# Allegro board AUTO_SAVE.brd
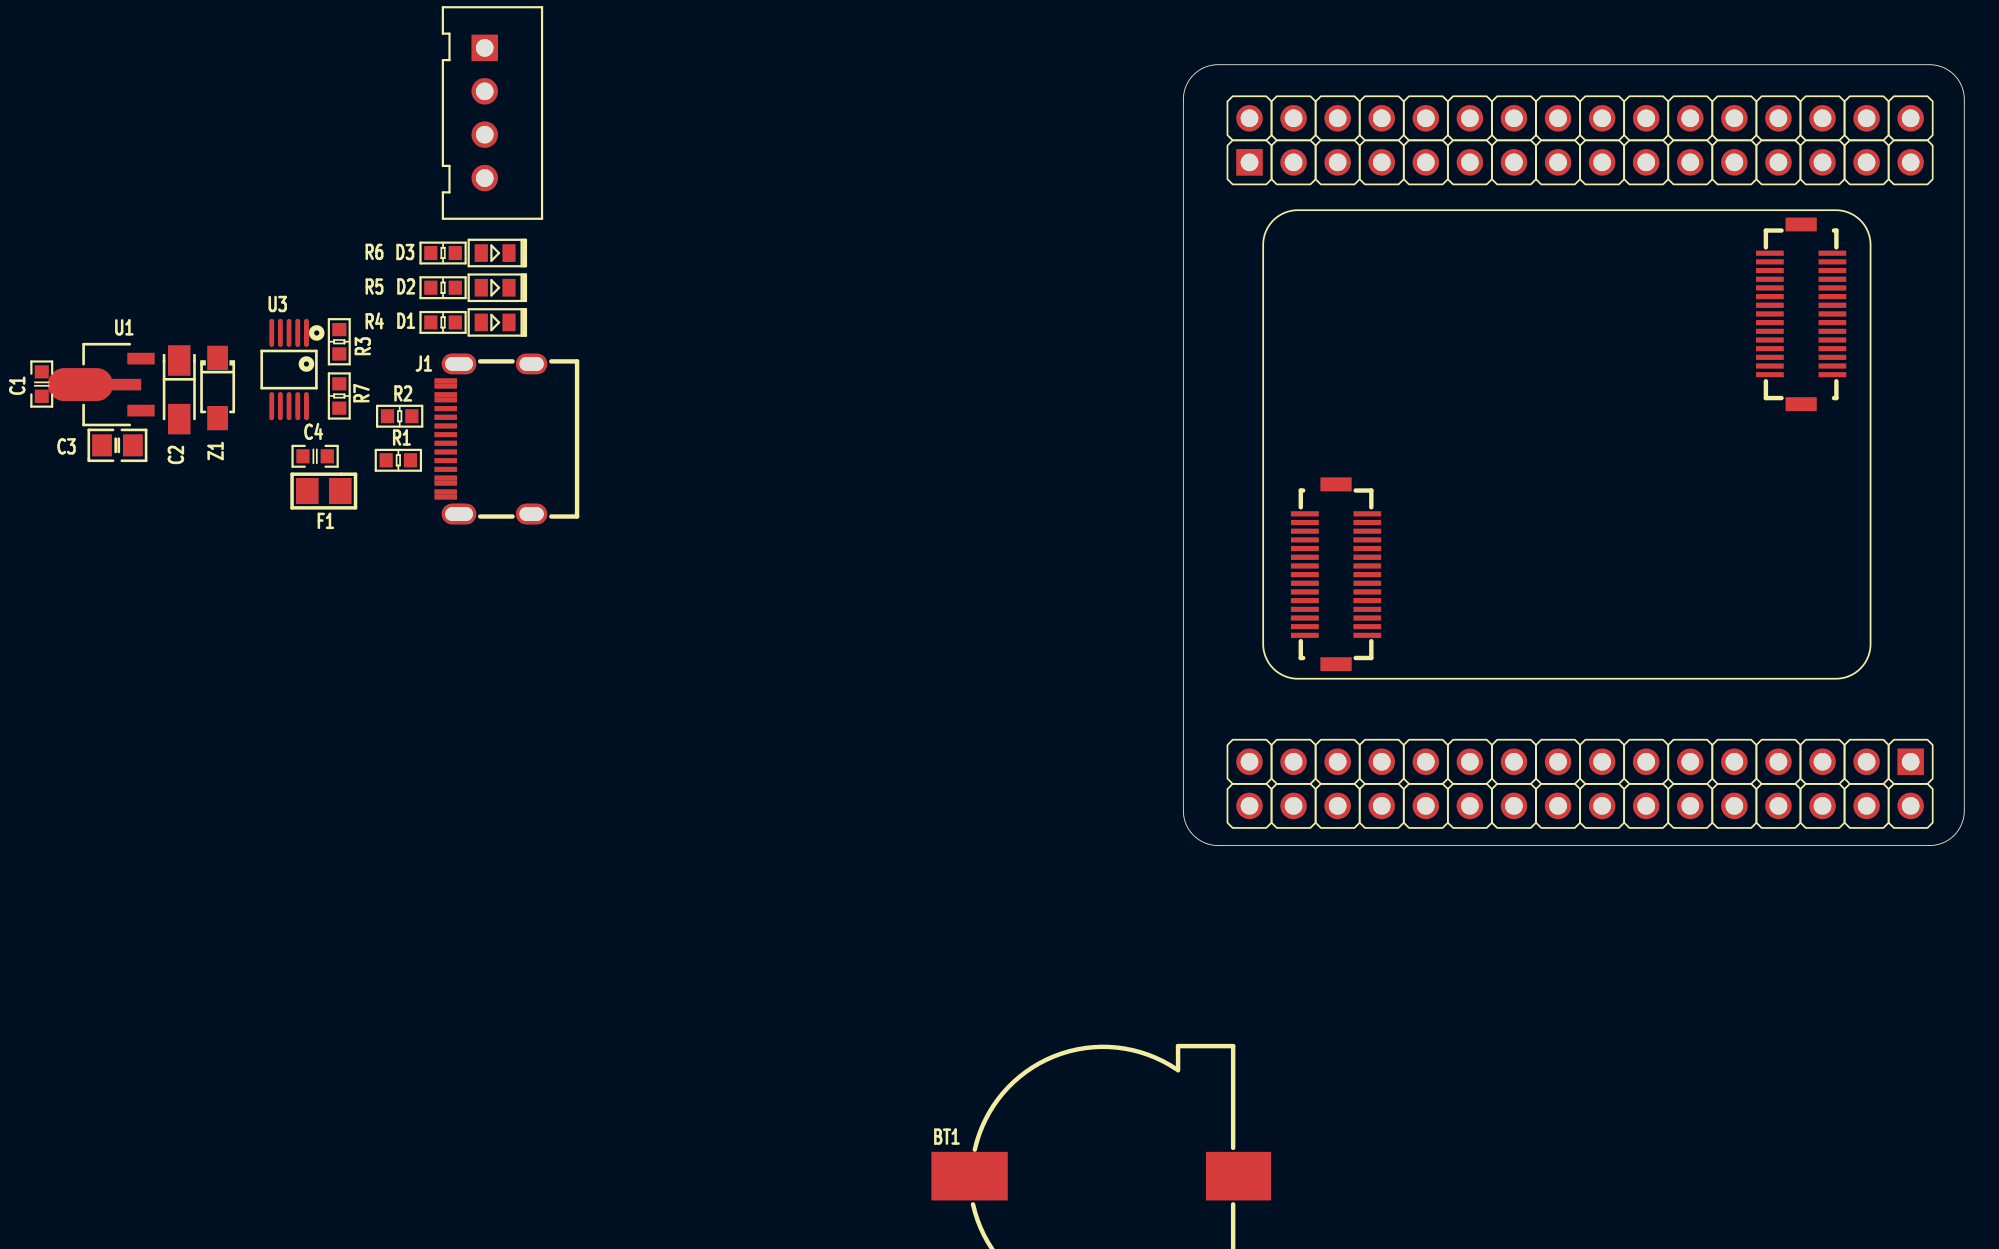
[diagram p0: board, top side]
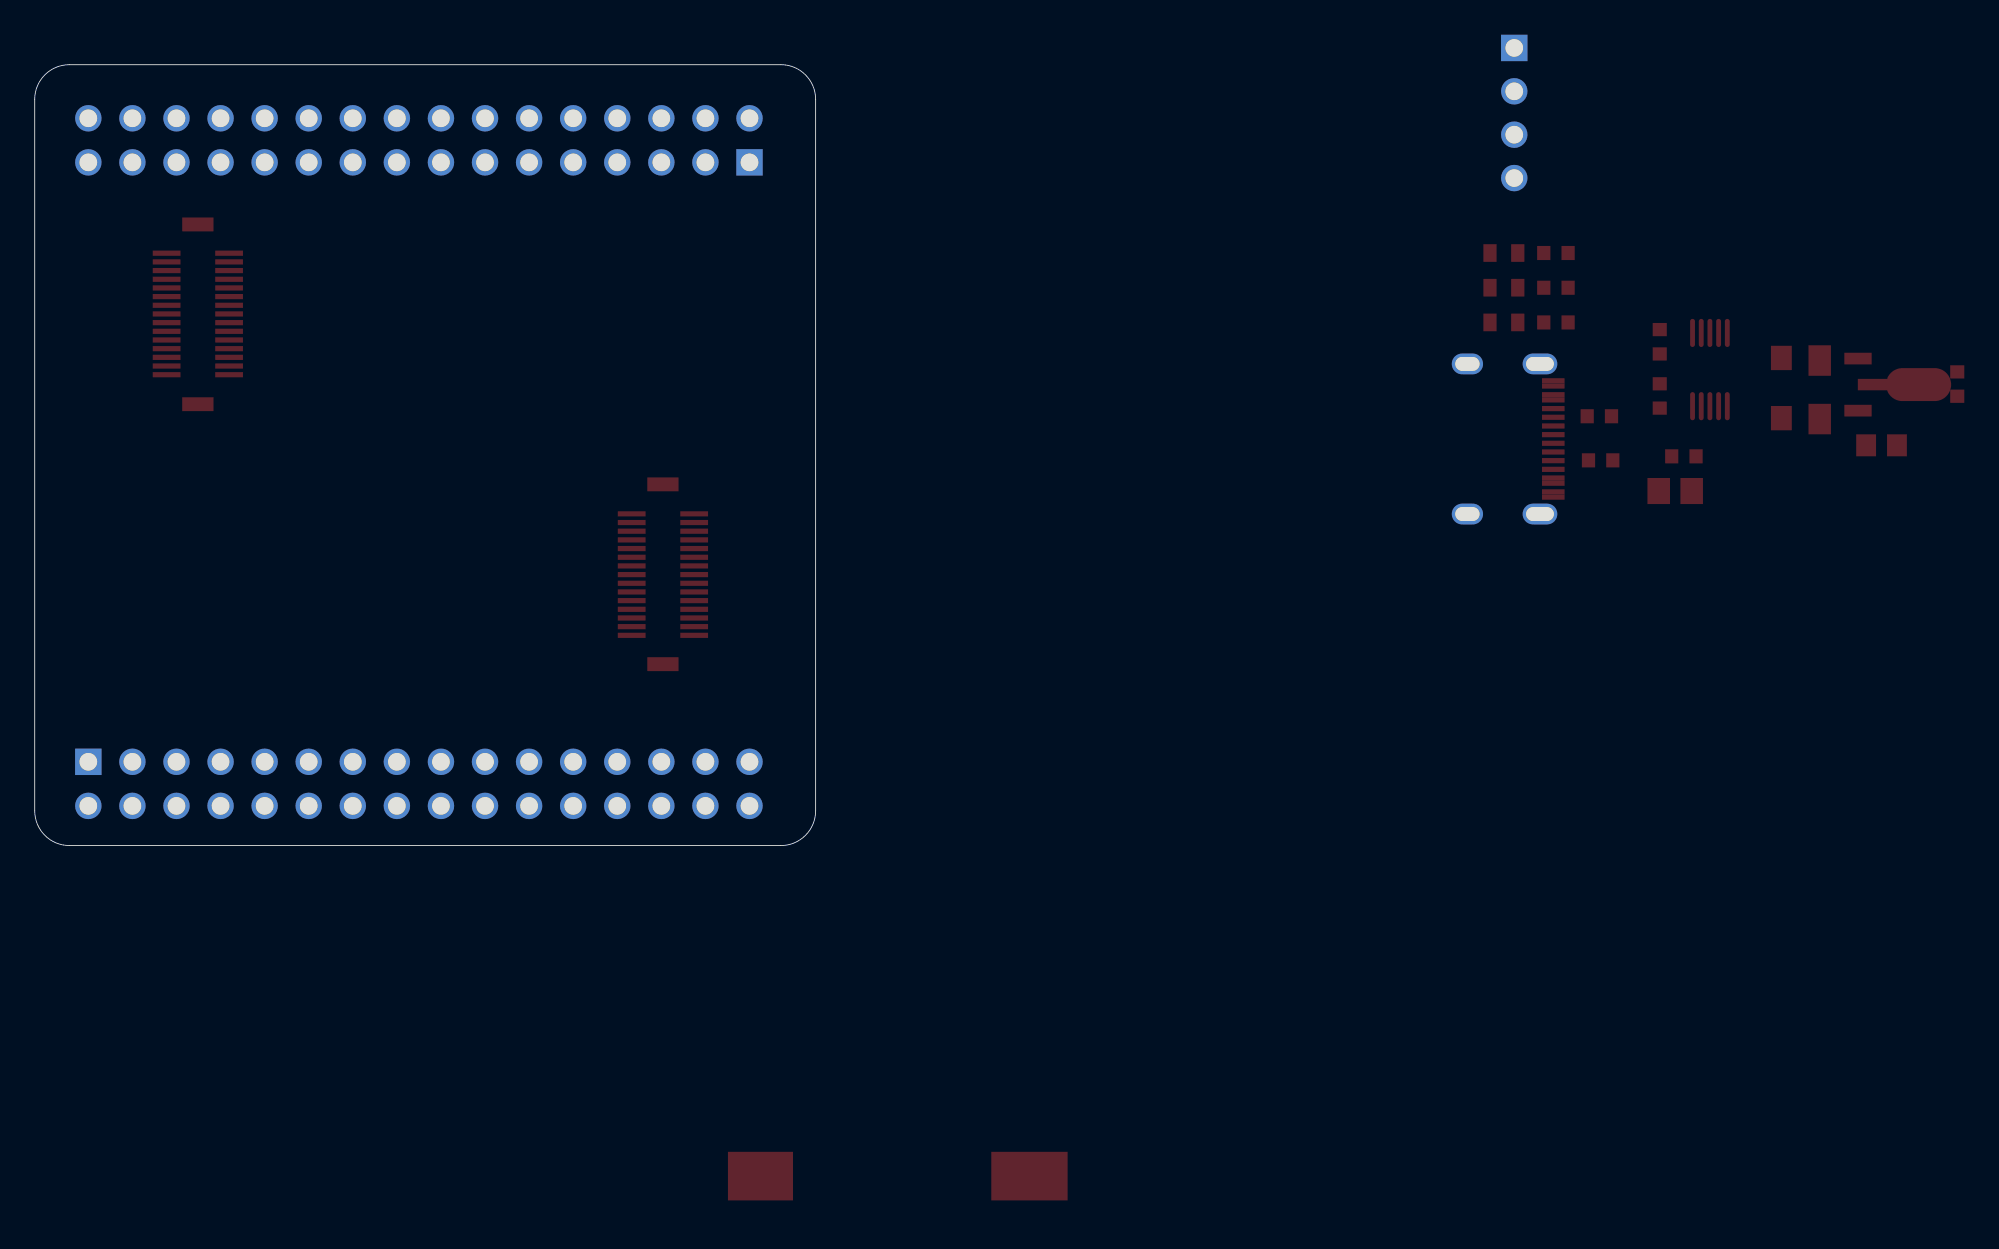
[diagram p1: board, bottom side, seen from below]

Outline 45 x 45 mm; copper layers: TOP, BOTTOM. Coordinates in mm from the lower left corner of the outline.
Outline path: 0,43 0,2 arc(0.59,0.59) 2,0 43,0 arc(44.41,0.59) 45,2 45,43 arc(44.41,44.41) 43,45 2,45 arc(0.59,44.41) 0,43

## Design rules (mm)
constraint set DEFAULT: min track width 0.152

## Placement (name value [footprint] x y rotation side)
BT1  CR1220  [CR1220_SMD]  -4.57 -19.05 0 top
C1  10uF  [C0603]  -65.79 26.59 90 top
C2  10uF  [CASE-A-3216]  -57.86 26.26 270 top
C3  10uF  [C0805]  -61.42 23.06 180 top
C4  0.1uF  [C0603]  -50.03 22.43 0 top
D1  LED  [LED0603]  -39.66 30.15 0 top
D2  LED  [LED0603]  -39.66 32.15 0 top
D3  LED  [LED0603]  -39.66 34.15 0 top
F1  BSMD0805-100-6V  [F0805]  -49.53 20.43 180 top
J1  Type-C 12P  [TYPE-C-12P]  -40.03 23.43 90 top
J2  2.54 2X16P  [CON_254-2X16P]  22.86 3.56 180 top
J3  2.54 2X16P  [CON_254-2X16P]  22.86 40.64 0 top
J4  SWD  [XH_254-4P]  -40.26 42.21 270 top
R1  5.1K  [R0603]  -45.24 22.2 0 top
R2  5.1K  [R0603]  -45.16 24.74 0 top
R3  1K  [R0603]  -48.64 29.03 90 top
R4  3K  [R0603]  -42.66 30.15 180 top
R5  3K  [R0603]  -42.66 32.15 180 top
R6  470R  [R0603]  -42.66 34.15 180 top
R7  1K(NC)  [R0603]  -48.64 25.91 270 top
U1  AMS1117  [SOT-89-3]  -61.42 26.56 0 top
U3  CH340X  [MSOP-10]  -51.53 27.43 180 top
U4  Ember_V1.1  [EMBERV1_1]  22.1 23.11 180 top
Z1  SMF7.0A  [SOD-123FL]  -55.65 26.37 270 top

## Library data of the parts
BT1 = BATTERY
C1 C3 C4 = C
C2 = CAP
D1-D3 = LED
F1 = FUSE
J1 = TYPE-C_12P_SMD
J2 J3 = CON_2X16
J4 = CON_4
R1-R7 = R
U1 = AMS1117_SOT89
U3 = CH340X
U4 = Ember_V1.1: Tolerance: .TOL; User Part Number: E11M015
Z1 = TVSA

## Footprints (pads in the part's own frame, mm; a bottom-side part is the same pattern mirrored in y, then rotated)
C0603
  rect 0.762x0.813 smd: 1(-0.701,0) 2(0.701,0)
C0805
  rect 1.143x1.27 smd: 1(-0.889,0) 2(0.889,0)
CASE-A-3216
  rect 1.758x1.295 smd: 1(-1.687,0) 2(1.687,0)
CON_254-2X16P
  rect 1.524x1.524 hole 1.016: 1(-19.05,-1.27)
  round 1.524 hole 1.016: 2(-19.05,1.27) 3(-16.51,-1.27) 4(-16.51,1.27) 5(-13.97,-1.27) 6(-13.97,1.27) 7(-11.43,-1.27) 8(-11.43,1.27) 9(-8.89,-1.27) 10(-8.89,1.27) 11(-6.35,-1.27) 12(-6.35,1.27) 13(-3.81,-1.27) 14(-3.81,1.27) 15(-1.27,-1.27) 16(-1.27,1.27) 17(1.27,-1.27) 18(1.27,1.27) 19(3.81,-1.27) 20(3.81,1.27) 21(6.35,-1.27) 22(6.35,1.27) 23(8.89,-1.27) 24(8.89,1.27) 25(11.43,-1.27) 26(11.43,1.27) 27(13.97,-1.27) 28(13.97,1.27) 29(16.51,-1.27) 30(16.51,1.27) 31(19.05,-1.27) 32(19.05,1.27)
CR1220_SMD
  rect 3.749x2.799 smd: 1(7.749,0)
  rect 4.399x2.799 smd: 2(-7.749,0)
EMBERV1_1
  rect 1.6x0.3 smd: 1(-15.3,-4.02) 2(-11.7,-4.02) 3(-15.3,-4.52) 4(-11.7,-4.52) 5(-15.3,-5.02) 6(-11.7,-5.02) 7(-15.3,-5.52) 8(-11.7,-5.52) 9(-15.3,-6.02) 10(-11.7,-6.02) 11(-15.3,-6.52) 12(-11.7,-6.52) 13(-15.3,-7.02) 14(-11.7,-7.02) 15(-15.3,-7.52) 16(-11.7,-7.52) 17(-15.3,-8.02) 18(-11.7,-8.02) 19(-15.3,-8.52) 20(-11.7,-8.52) 21(-15.3,-9.02) 22(-11.7,-9.02) 23(-15.3,-9.52) 24(-11.7,-9.52) 25(-15.3,-10.02) 26(-11.7,-10.02) 27(-15.3,-10.52) 28(-11.7,-10.52) 29(-15.3,-11.02) 30(-11.7,-11.02) 31(15.1,4) 32(11.5,4) 33(15.1,4.5) 34(11.5,4.5) 35(15.1,5) 36(11.5,5) 37(15.1,5.5) 38(11.5,5.5) 39(15.1,6) 40(11.5,6) 41(15.1,6.5) 42(11.5,6.5) 43(15.1,7) 44(11.5,7) 45(15.1,7.5) 46(11.5,7.5) 47(15.1,8) 48(11.5,8) 49(15.1,8.5) 50(11.5,8.5) 51(15.1,9) 52(11.5,9) 53(15.1,9.5) 54(11.5,9.5) 55(15.1,10) 56(11.5,10) 57(15.1,10.5) 58(11.5,10.5) 59(15.1,11) 60(11.5,11)
  rect 1.801x0.8 smd: 61(-13.5,-2.32) 62(-13.5,-12.68) 63(13.3,12.66) 64(13.3,2.3)
F0805
  rect 1.301x1.501 smd: 1(-0.95,0) 2(0.95,0)
LED0603
  rect 0.762x1.016 smd: 1(-0.8,0) 2(0.8,0)
MSOP-10
  oval 0.279x1.62 smd: 1(-1.001,-2.111) 2(-0.5,-2.111) 3(0,-2.111) 4(0.5,-2.111) 5(1.001,-2.111) 6(1.001,2.111) 7(0.5,2.111) 8(0,2.111) 9(-0.5,2.111) 10(-1.001,2.111)
R0603
  rect 0.762x0.813 smd: 1(-0.701,0) 2(0.701,0)
SOD-123FL
  rect 1.399x1.199 smd: 1(1.735,0) 2(-1.735,0)
SOT-89-3
  rect 1.575x0.673 smd: 1(1.356,-1.501) 3(1.356,1.499)
  custom 5.375x1.9 smd: 2(-1.321,0)
TYPE-C-12P
  rect 0.3x1.301 smd: A1(-3.35,2.474) A4(-2.55,2.474) A5(-1.25,2.474) A6(-0.249,2.474) A7(0.249,2.474) A8(1.25,2.474) A9(2.55,2.474) A12(3.35,2.474) B1(3.05,2.474) B4(2.25,2.474) B5(1.75,2.474) B6(0.749,2.474) B7(-0.749,2.474) B8(-1.75,2.474) B9(-2.25,2.474) B12(-3.05,2.474)
  oval 1.199x1.999 hole 0.8x1.6: G1(-4.326,1.707) G2(4.326,1.707)
  oval 1.199x1.801 hole 0.8x1.399: G3(-4.326,-2.474) G4(4.326,-2.474)
XH_254-4P
  rect 1.524x1.524 hole 1.016: 1(-3.75,0)
  round 1.524 hole 1.016: 2(-1.25,0) 3(1.25,0) 4(3.75,0)

## Nets
5V: C1.2 F1.2 J2.1 J3.1 R4.2 U1.3 U4.2 U4.32 Z1.2
GND: BT1.2 C1.1 C2.2 C3.1 C4.2 D1.2(CATHODE) D2.2(CATHODE) J1.A1 J1.A12 J1.B1 J1.B12 J1.G1 J1.G2 J1.G3 J1.G4 J2.29 J2.30 J2.31 J2.32 J3.29 J3.30 J3.31 J3.32 J4.4 R1.1 R2.1 U1.1 U3.3 U4.29 U4.30 U4.59 U4.60 Z1.1
VBAT: BT1.1 J3.6 U4.5
VCC3V3: C2.1 C3.2 C4.1 J2.2 J4.1 R5.2 R6.2 U1.2(VOUT) U3.7(VCC) U3.10 U4.31(VCC3V3)
BOOT0: J3.5 R7.2 U3.6 U4.6
D+: J1.A6 J1.B6 U3.1
D-: J1.A7 J1.B7 U3.2
NRST: J3.14 R3.2 U4.13
PA0: J3.24 U4.23
PA1: J3.26 U4.25
PA2: J3.28 U4.27
PA3: J2.25 U4.56
PA4: J2.23 U4.54
PA5: J2.21 U4.52
PA6: J2.19 U4.50
PA7: J2.17 U4.48
PA8: J2.14 U4.43
PA9: J2.12 U3.9 U4.41
PA10: J2.10 U3.8 U4.39
PA11: J2.8 U4.37
PA12: J2.6 U4.35
PA13: J2.4 J4.3 U4.33
PA14: J3.27 J4.2 U4.28
PA15: J3.25 U4.26
PB0: J2.11 U4.42
PB1: J2.9 U4.40
PB2: J2.7 U4.38
PB3: J3.15 U4.16
PB4: J3.13 U4.14
PB5: J3.11 U4.12
PB6: J3.9 U4.10
PB7: J3.7 U4.8
PB8: J3.3 U4.4
PB9: J3.4 U4.3
PB10: J2.5 U4.36
PB11: J2.3 U4.34
PB12: J2.27 U4.58
PB13: J2.28 U4.57
PB14: J2.26 U4.55
PB15: J2.24 U4.53
PC0: J3.16 U4.15
PC1: J3.18 U4.17
PC2: J3.20 U4.19
PC3: J3.22 U4.21
PC4: J2.15 U4.46
PC5: J2.13 U4.44
PC6: J2.22 U4.51
PC7: J2.20 U4.49
PC8: J2.18 U4.47
PC9: D3.2(CATHODE) J2.16 U4.45
PC10: J3.23 U4.24
PC11: J3.21 U4.22
PC12: J3.19 U4.20
PC13: J3.8 U4.7
PC14: J3.10 U4.9
PC15: J3.12 U4.11
PD2: J3.17 U4.18
VREF: J3.2 U4.1
N695529: R3.1 U3.4
N695551: R7.1 U3.5
N701179: F1.1 J1.A4 J1.A9 J1.B4 J1.B9(VBUS4)
N701299: J1.A5 R1.2
N701377: J1.B5 R2.2
N703342: D1.1 R4.1
N703346: D2.1 R5.1
N703350: D3.1 R6.1

Pads without a net: J1 A8 B8; U4 61 62 63 64
